# EAGLE board medi_3_cpx (EAGLE 6.0)
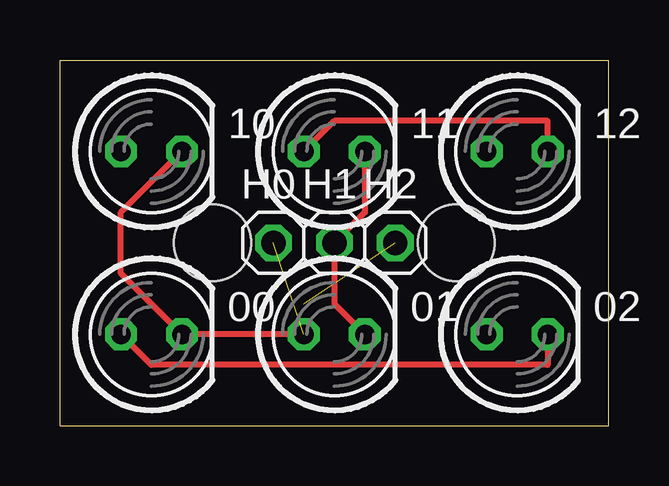
[diagram p0: board, top side]
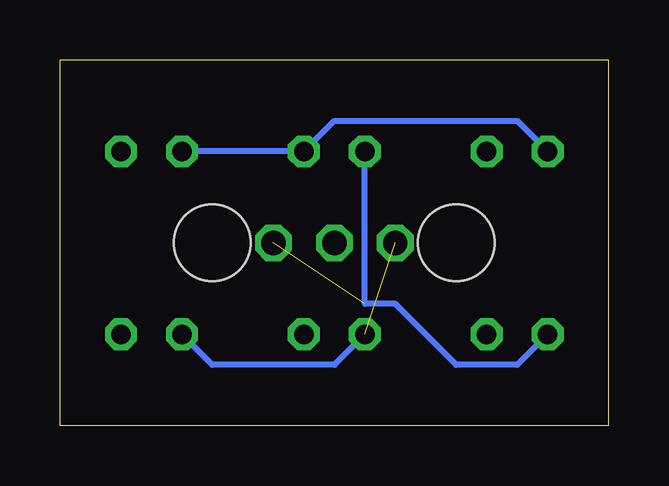
[diagram p1: board, bottom side, seen from below]

Size 22.86 x 15.24 mm. Coordinates in mm from the lower left corner, seen from the top.
Outline: 0,0 0,15.24 22.86,15.24 22.86,0 0,0
Copper layers (1*16): Top 0.035mm / dielectric 1.5mm / Bottom 0.035mm
Design rules: minimum track width 10mil, minimum drill 24mil, track to track 8mil, track to pad 8mil, pad to pad 8mil, via to via 8mil, smd to smd 8mil, copper to edge 40mil, drill to drill 8mil, minimum pad ring 10mil, minimum via ring 8mil, stop-mask expansion 4mil, vias tented up to drill 0mil, thermal gap 10mil
Holes 3.2 mm at 6.35,7.62 16.51,7.62

## Footprints (pad centres in the part's own frame; a part is rotated, then mirrored left to right if it is on the bottom)
LED5MM = drill 0.813 octagon: A -1.27,0; K 1.27,0
1X01 = drill 1.016 octagon: 1 0,0

## Placement (x,y rotation side)
00  [LED5MM]  3.81,3.81 0 top
01  [LED5MM]  11.43,3.81 0 top
02  [LED5MM]  19.05,3.81 0 top
10  [LED5MM]  3.81,11.43 0 top
11  [LED5MM]  11.43,11.43 0 top
12  [LED5MM]  19.05,11.43 0 top
H0  [1X01]  8.89,7.62 0 top
H1  [1X01]  11.43,7.62 0 top
H2  [1X01]  13.97,7.62 0 top

## Library data of the parts
00 01 02 10-12 = led
H0 H1 H2 = pinhead

## Nets
D: 00.A 02.K 11.A 12.K H2.1
S0: 00.K 01.A 02.A 10.K H0.1
S1: 01.K 10.A 11.K 12.A H1.1

## Tracks (layer width: path | path; a pad name or v marks a point on that pad's centre or on a via)
D  (1 unrouted)
  Top 0.254: 11.A 11.43,12.7 20.32,12.7 12.K | 00.A 3.81,2.54 20.32,2.54 02.K
  Bottom 0.254: 11.A 10.16,5.08 8.89,5.08 6.35,2.54 3.81,2.54 00.A
S0  (1 unrouted)
  Top 0.254: 01.A 00.K 2.54,6.35 2.54,8.89 10.K
  Bottom 0.254: 02.A 16.51,2.54 11.43,2.54 01.A
S1
  Top 0.254: 01.K 11.43,5.08 H1.1 12.7,8.89 11.K
  Bottom 0.254: 10.A 3.81,12.7 11.43,12.7 11.K 12.A